# Allegro board fulladd.brd
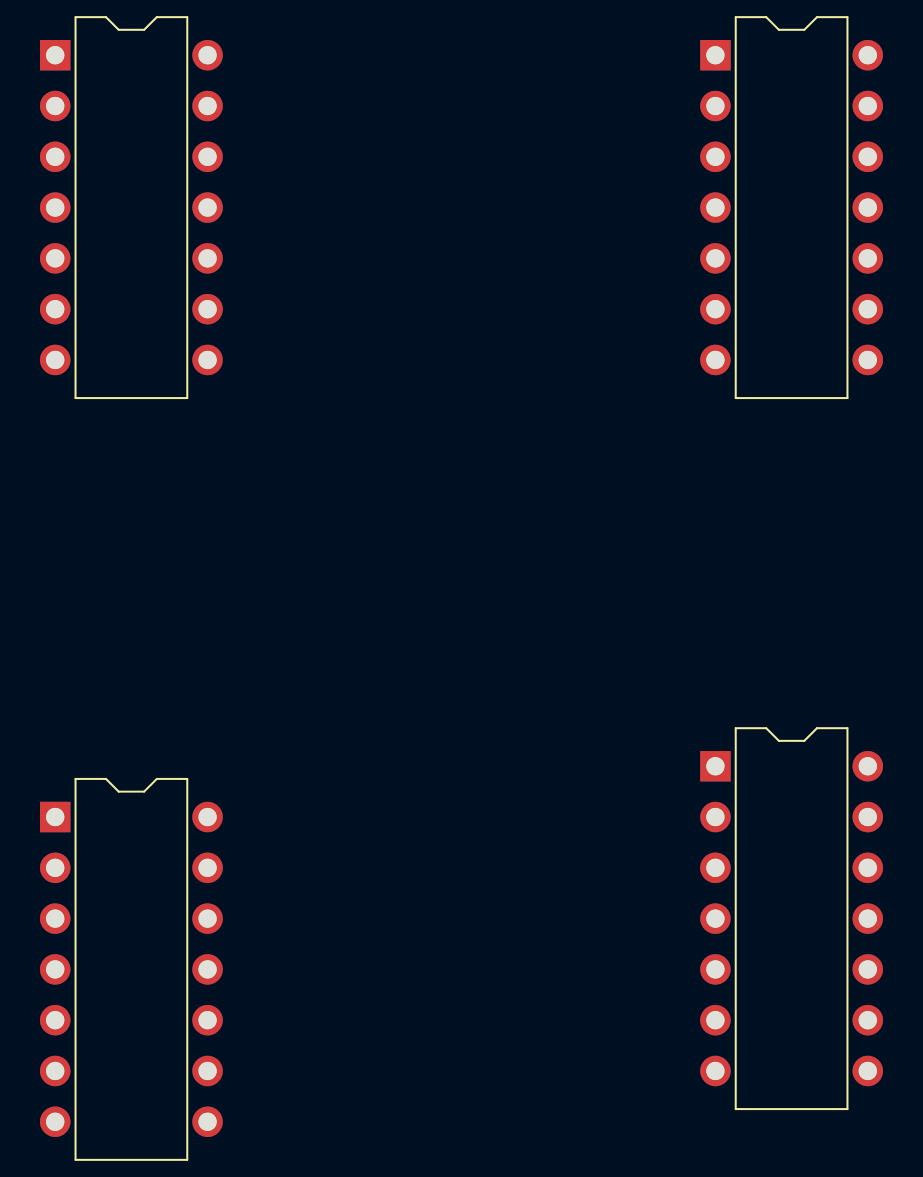
[diagram p0: board, top side]
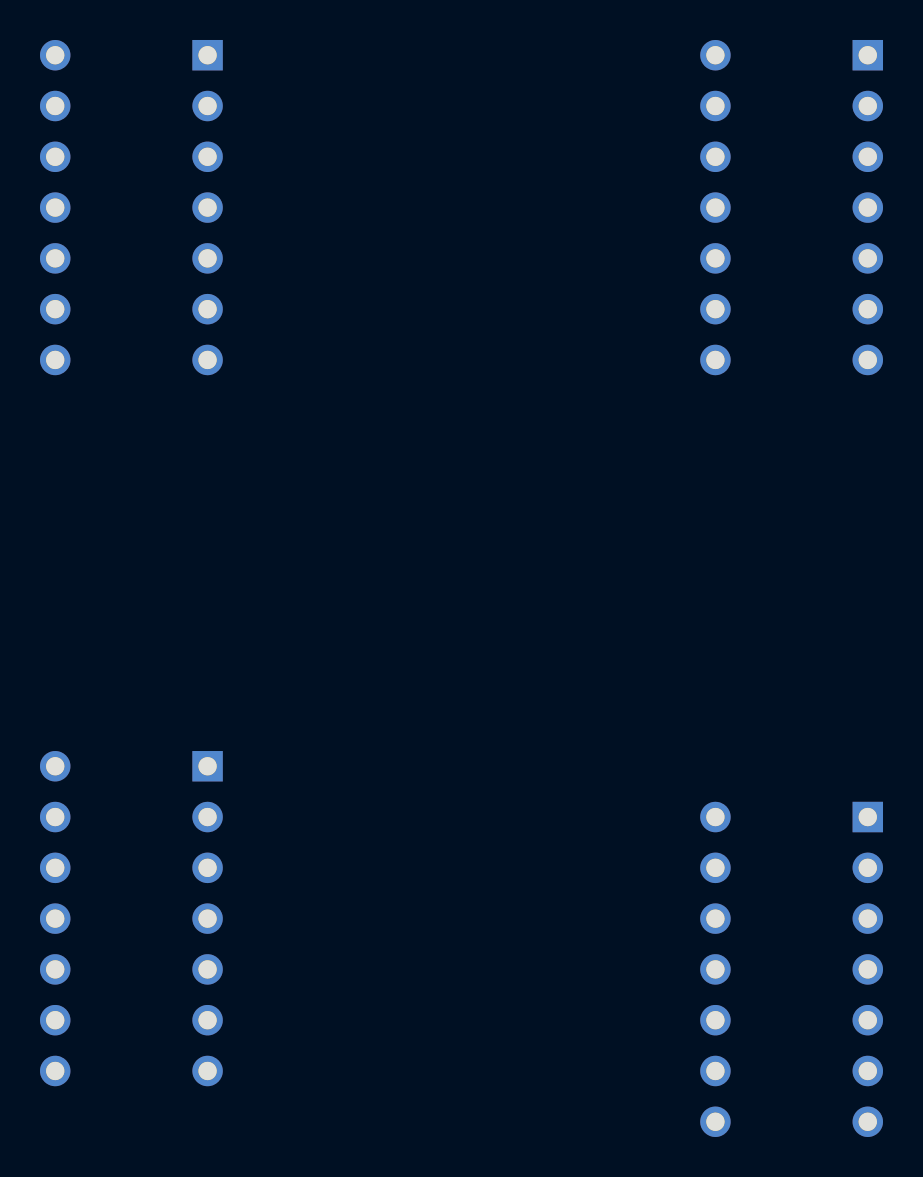
[diagram p1: board, bottom side, seen from below]

No outline. copper layers: TOP, BOTTOM. Coordinates in mm from the lowest, leftmost part position.

## Design rules (mm)
constraint set DEFAULT: min track width 0.127

## Placement (name value [footprint] x y rotation side)
U1  ***  [DIP14_3]  0 38.1 0 top
U2  ***  [DIP14_3]  33.02 38.1 0 top
U3  ***  [DIP14_3]  33.02 2.54 0 top
U4  ***  [DIP14_3]  0 0 0 top

## Library data of the parts
U1 = 74LS32
U2 U4 = 74LS08
U3 = 74LS04

## Footprints (pads in the part's own frame, mm; a bottom-side part is the same pattern mirrored in y, then rotated)
DIP14_3
  rect 1.524x1.524 hole 0.914: 1(0,0)
  round 1.524 hole 0.914: 2(0,-2.54) 3(0,-5.08) 4(0,-7.62) 5(0,-10.16) 6(0,-12.7) 7(0,-15.24) 8(7.62,-15.24) 9(7.62,-12.7) 10(7.62,-10.16) 11(7.62,-7.62) 12(7.62,-5.08) 13(7.62,-2.54) 14(7.62,0)

## Nets
GND: U1.7 U2.7 U3.7 U4.7
VCC: U1.14 U2.14 U3.14 U4.14
CARRY_IN: U2.1 U2.10 U3.1
CARRY_OUT: U1.3
N00032_321: U1.9 U2.11(O)
N00034_323: U1.10 U4.3
N5056796111_320: U2.13 U3.8
SUM: U1.6
X: U2.12 U3.5 U4.5
X_BAR: U2.5 U3.2
X_BAR_318: U3.6 U4.2
Y: U3.9 U4.1 U4.4
N00011: U1.8 U2.4 U2.9 U3.3
N00013: U1.1 U2.8
N00023: U1.2 U4.6
N00032: U1.4 U2.3
N00034: U1.5 U2.6
N5056796111: U2.2 U3.4

Pads without a net: U1 11 12 13; U3 10 11 12 13; U4 8 9 10 11 12 13
